# EAGLE board slugsMKIII (EAGLE 5.06)

Size 160 x 100 mm. Coordinates in mm from the lower left corner, seen from the top.
Outline: 0,0 160,0 160,100 0,100 0,0
Copper layers (1*16): Top 0.035mm / dielectric 1.5mm / Bottom 0.035mm
Design rules "default": minimum track width 10mil, minimum drill 24mil, track to track 8mil, track to pad 8mil, pad to pad 8mil, via to via 8mil, smd to smd 8mil, copper to edge 40mil, drill to drill 8mil, minimum pad ring 10mil, minimum via ring 8mil, stop-mask expansion 4mil, vias tented up to drill 0mil, thermal gap 10mil

## Footprints (pad centres in the part's own frame; a part is rotated, then mirrored left to right if it is on the bottom)
C0603 = smd 1.1 x 1: 1 -0.85,0; 2 0.85,0
C0805 = smd 1.3 x 1.5: 1 -0.95,0; 2 0.95,0
PANASONIC_G = smd 3.9 x 1.6: + 4.25,0; - -4.25,0
C1206 = smd 1.6 x 1.8: 1 -1.4,0; 2 1.4,0
SOD523 = smd 0.7 x 0.5: A 0.7,0; C -0.6,0
CHIP-LED0603 = smd 0.8 x 0.8: A 0,-0.75; C 0,0.75
DO35-10 = drill 0.813 pad 1.778 round: A 5.08,0; C -5.08,0
SOT23 = smd 1 x 1.4: 1 -0.95,-1.1; 2 0.95,-1.1; 3 0,1.1
CONECTOR_60_TYCO_MODIFICADO = drill 0.559 pad 0.65 long: 1 -18.415,11.099; 2 -17.145,11.099; 3 -15.875,11.099; 4 -14.605,11.099; 5 -13.335,11.099; 6 -12.065,11.099; 7 -10.795,11.099; 8 -9.525,11.099; 9 -8.255,11.099; 10 -6.985,11.099; 11 -5.715,11.099; 12 -4.445,11.099; 13 -3.175,11.099; 14 -1.905,11.099; 15 -0.635,11.099; 16 0.635,11.099; 17 1.905,11.099; 18 3.175,11.099; 19 4.445,11.099; 20 5.715,11.099; 21 6.985,11.099; 22 8.255,11.099; 23 9.525,11.099; 24 10.795,11.099; 25 12.065,11.099; 26 13.335,11.099; 27 14.605,11.099; 28 15.875,11.099; 29 17.145,11.099; 30 18.415,11.099; 31 18.415,8.599; 32 17.145,8.599; 33 15.875,8.599; 34 14.605,8.599; 35 13.335,8.599; 36 12.065,8.599; 37 10.795,8.599; 38 9.525,8.599; 39 8.225,8.599; 40 6.985,8.599; 41 5.715,8.599; 42 4.445,8.599; 43 3.175,8.599; 44 1.905,8.599; 45 0.635,8.599; 46 -0.635,8.599; 47 -1.905,8.599; 48 -3.175,8.599; 49 -4.445,8.599; 50 -5.715,8.599; 51 -6.985,8.599; 52 -8.255,8.599; 53 -9.525,8.599; 54 -10.795,8.599; 55 -12.065,8.599; 56 -13.335,8.599; 57 -14.605,8.599; 58 -15.875,8.599; 59 -17.145,8.599; 60 -18.415,8.599 | drill 0.94 pad 1.524 round: S1 -17.145,4.495; S2 0,4.495; S3 17.145,4.495
CON_BAT = drill 1 square: 1 -1.27,0; 2 1.27,0
R0603 = smd 1 x 1.1: 1 -0.85,0; 2 0.85,0
DSPIC33FJ256MC710PT = smd 1.5 x 0.2: 1 -6.7,4.8; 2 -6.7,4.4; 3 -6.7,4; 4 -6.7,3.6; 5 -6.7,3.2; 6 -6.7,2.8; 7 -6.7,2.4; 8 -6.7,2; 9 -6.7,1.6; 10 -6.7,1.2; 11 -6.7,0.8; 12 -6.7,0.4; 13 -6.7,0; 14 -6.7,-0.4; 15 -6.7,-0.8; 16 -6.7,-1.2; 17 -6.7,-1.6; 18 -6.7,-2; 19 -6.7,-2.4; 20 -6.7,-2.8; 21 -6.7,-3.2; 22 -6.7,-3.6; 23 -6.7,-4; 24 -6.7,-4.4; 25 -6.7,-4.8; 51 6.7,-4.8; 52 6.7,-4.4; 53 6.7,-4; 54 6.7,-3.6; 55 6.7,-3.2; 56 6.7,-2.8; 57 6.7,-2.4; 58 6.7,-2; 59 6.7,-1.6; 60 6.7,-1.2; 61 6.7,-0.8; 62 6.7,-0.4; 63 6.7,0; 64 6.7,0.4; 65 6.7,0.8; 66 6.7,1.2; 67 6.7,1.6; 68 6.7,2; 69 6.7,2.4; 70 6.7,2.8; 71 6.7,3.2; 72 6.7,3.6; 73 6.7,4; 74 6.7,4.4; 75 6.7,4.8 | smd 0.2 x 1.5: 26 -4.8,-6.7; 27 -4.4,-6.7; 28 -4,-6.7; 29 -3.6,-6.7; 30 -3.2,-6.7; 31 -2.8,-6.7; 32 -2.4,-6.7; 33 -2,-6.7; 34 -1.6,-6.7; 35 -1.2,-6.7; 36 -0.8,-6.7; 37 -0.4,-6.7; 38 0,-6.7; 39 0.4,-6.7; 40 0.8,-6.7; 41 1.2,-6.7; 42 1.6,-6.7; 43 2,-6.7; 44 2.4,-6.7; 45 2.8,-6.7; 46 3.2,-6.7; 47 3.6,-6.7; 48 4,-6.7; 49 4.4,-6.7; 50 4.8,-6.7; 76 4.8,6.7; 77 4.4,6.7; 78 4,6.7; 79 3.6,6.7; 80 3.2,6.7; 81 2.8,6.7; 82 2.4,6.7; 83 2,6.7; 84 1.6,6.7; 85 1.2,6.7; 86 0.8,6.7; 87 0.4,6.7; 88 0,6.7; 89 -0.4,6.7; 90 -0.8,6.7; 91 -1.2,6.7; 92 -1.6,6.7; 93 -2,6.7; 94 -2.4,6.7; 95 -2.8,6.7; 96 -3.2,6.7; 97 -3.6,6.7; 98 -4,6.7; 99 -4.4,6.7; 100 -4.8,6.7; P$63 -0.4,-6.7
CAN = smd 0.41 x 0.75: 1 -1.905,-3.075; 2 -0.635,-3.075; 3 0.635,-3.075; 4 1.905,-3.075; 5 1.905,3.075; 6 0.635,3.075; 7 -0.635,3.075; 8 -1.905,3.075
ECS2003 = smd 0.9 x 1.1: 1 -0.9,-0.7; 2 0.9,-0.7; 3 0.9,0.7; 4 -0.9,0.7
MCP9700_PATRON_RECOMENDADO = smd 0.5 x 0.95: 1 0.65,1.1; 2 -0.65,1.1; 3 0,-1.1
74CBTLV16210 = smd 0.273 x 0.765: 1 -7.302,-4.812; 2 -6.667,-4.812; 3 -6.032,-4.812; 4 -5.397,-4.812; 5 -4.762,-4.812; 6 -4.127,-4.812; 7 -3.492,-4.812; 8 -2.857,-4.812; 9 -2.222,-4.812; 10 -1.587,-4.812; 11 -0.953,-4.812; 12 -0.318,-4.812; 13 0.318,-4.812; 14 0.953,-4.812; 15 1.587,-4.812; 16 2.222,-4.812; 17 2.857,-4.812; 18 3.492,-4.812; 19 4.127,-4.812; 20 4.762,-4.812; 21 5.397,-4.812; 22 6.032,-4.812; 23 6.667,-4.812; 24 7.302,-4.812; 25 7.302,4.812; 26 6.667,4.812; 27 6.032,4.812; 28 5.397,4.812; 29 4.762,4.812; 30 4.127,4.812; 31 3.492,4.812; 32 2.857,4.812; 33 2.222,4.812; 34 1.587,4.812; 35 0.953,4.812; 36 0.318,4.812; 37 -0.318,4.812; 38 -0.953,4.812; 39 -1.587,4.812; 40 -2.222,4.812; 41 -2.857,4.812; 42 -3.492,4.812; 43 -4.127,4.812; 44 -4.762,4.812; 45 -5.397,4.812; 46 -6.032,4.812; 47 -6.667,4.812; 48 -7.302,4.812
MAX3223E = smd 0.3 x 0.55: 1 -1.3,-2.15; 2 -0.65,-2.15; 3 0,-2.15; 4 0.65,-2.15; 5 1.3,-2.15; 11 1.3,2.15; 12 0.65,2.15; 13 0,2.15; 14 -0.65,2.15; 15 -1.3,2.15 | smd 0.55 x 0.3: 6 2.15,-1.3; 7 2.15,-0.65; 8 2.15,0; 9 2.15,0.65; 10 2.15,1.3; 16 -2.15,1.3; 17 -2.15,0.65; 18 -2.15,0; 19 -2.15,-0.65; 20 -2.15,-1.3
PIC12F683 = smd 0.41 x 0.835: 1 -1.905,-2.57; 2 -0.635,-2.57; 3 0.635,-2.57; 4 1.905,-2.57; 5 1.905,2.57; 6 0.635,2.57; 7 -0.635,2.57; 8 -1.905,2.57
PTN78000WAH = drill 1.05 pad 1.778 round: 1 -7.94,4.76; 2 -7.94,-1.58; 3 -7.94,-4.76 | drill 1.05 pad 1.676 round: 4 7.94,-4.76; 5 7.94,4.76
LP38690SD-3.3 = smd 0.35 x 0.6: 1 0.95,1.4; 2 0,1.4; 3 -0.95,1.4; 4 -0.95,-1.4; 5 0,-1.4; 6 0.95,-1.4 | smd 2.1 x 1.6: GND 0,0
M08A = smd 0.6 x 2.2: 1 0,0; 2 1.27,0; 3 2.54,0; 4 3.81,0; 5 3.81,5.2; 6 2.54,5.2; 7 1.27,5.2; 8 0,5.2
ADIS16355AMLZ = smd 0.61 x 1.37: 1 5.5,-23.35; 2 5.5,-20.42; 3 4.5,-23.35; 4 4.5,-20.42; 5 3.5,-23.35; 6 3.5,-20.42; 7 2.5,-23.35; 8 2.5,-20.42; 9 1.5,-23.35; 10 1.5,-20.42; 11 0.5,-23.35; 12 0.5,-20.42; 13 -0.5,-23.35; 14 -0.5,-20.42; 15 -1.5,-23.35; 16 -1.5,-20.42; 17 -2.5,-23.35; 18 -2.5,-20.42; 19 -3.5,-23.35; 20 -3.5,-20.42; 21 -4.5,-23.35; 22 -4.5,-20.42; 23 -5.5,-23.35; 24 -5.5,-20.42
MTC14 = smd 0.42 x 1.78: 1 0,0; 2 0.65,0; 3 1.3,0; 4 1.95,0; 5 2.6,0; 6 3.25,0; 7 3.9,0; 8 3.9,5.94; 9 3.25,5.94; 10 2.6,5.94; 11 1.95,5.94; 12 1.3,5.94; 13 0.65,5.94; 14 0,5.94
1317A-03 = smd 1.35 x 0.69: 1 0,0; 2 0,-1.27; 3 0,-2.54; 4 0,-3.81; 5 9.83,-3.81; 6 9.83,-2.54; 7 9.83,-1.27; 8 9.83,0
1351-01 = smd 2.54 x 1.52: 1 0,0; 2 0,-2.54; 3 0,-5.08; 4 0,-7.62; 5 16.76,-7.62; 6 16.76,-5.08; 7 16.76,-2.54; 8 16.76,0
SOIC-8 = smd 1.7 x 0.65: 1 -3.759,1.905; 2 -3.759,0.635; 3 -3.759,-0.635; 4 -3.759,-1.905; 5 3.759,-1.905; 6 3.759,-0.635; 7 3.759,0.635; 8 3.759,1.905

## Placement (x,y rotation side)
C1  .1u  [C0603]  -67.31,107.95 0 top  (outside the outline)
C2  .1u  [C0603]  -72.39,107.95 0 top  (outside the outline)
C3  .1u  [C0603]  -77.47,107.95 0 top  (outside the outline)
C4  .1u  [C0603]  -82.55,107.95 0 top  (outside the outline)
C5  .1u  [C0603]  -87.63,107.95 0 top  (outside the outline)
C6  .1u  [C0603]  -92.71,107.95 0 top  (outside the outline)
C7  .1u  [C0603]  -97.79,107.95 0 top  (outside the outline)
C8  10u  [C0805]  -87.63,81.28 0 top  (outside the outline)
C9  .1u  [C0603]  -15.24,113.03 0 top  (outside the outline)
C10  .1u  [C0603]  -91.44,87.63 0 top  (outside the outline)
C11  .1u  [C0603]  -16.51,107.95 0 top  (outside the outline)
C12  .1u  [C0603]  -96.52,87.63 0 top  (outside the outline)
C13  .1u  [C0603]  -16.51,92.71 0 top  (outside the outline)
C14  .1u  [C0603]  -21.59,92.71 0 top  (outside the outline)
C15  .1u  [C0603]  -26.67,92.71 0 top  (outside the outline)
C16  10u  [C0805]  -41.91,81.28 0 top  (outside the outline)
C17  1u  [C0603]  -31.75,92.71 0 top  (outside the outline)
C18  1n  [C0603]  -36.83,92.71 0 top  (outside the outline)
C19  .1u  [C0603]  -41.91,92.71 0 top  (outside the outline)
C20  .1u  [C0603]  -46.99,92.71 0 top  (outside the outline)
C21  .1u  [C0603]  -52.07,92.71 0 top  (outside the outline)
C22  1u  [C0603]  -57.15,92.71 0 top  (outside the outline)
C23  1u  [C0603]  -62.23,92.71 0 top  (outside the outline)
C24  1u  [C0603]  -67.31,92.71 0 top  (outside the outline)
C25  1u  [C0603]  -72.39,92.71 0 top  (outside the outline)
C26  1u  [C0603]  -77.47,92.71 0 top  (outside the outline)
C27  .1u  [C0603]  -82.55,92.71 0 top  (outside the outline)
C28  .1u  [C0603]  -87.63,92.71 0 top  (outside the outline)
C29  .1u  [C0603]  -92.71,92.71 0 top  (outside the outline)
C30  .1u  [C0603]  -97.79,92.71 0 top  (outside the outline)
C31  .1u  [C0603]  -16.51,97.79 0 top  (outside the outline)
C32  .1u  [C0603]  -21.59,97.79 0 top  (outside the outline)
C33  .1u  [C0603]  -26.67,97.79 0 top  (outside the outline)
C34  220u  [PANASONIC_G]  -44.45,62.23 0 top  (outside the outline)
C35  10u,20V  [C1206]  -31.75,81.28 0 top  (outside the outline)
C36  10u  [C0805]  -46.99,81.28 0 top  (outside the outline)
C37  220u  [PANASONIC_G]  38.1,19.05 0 top
C38  .1u  [C0603]  -31.75,97.79 0 top  (outside the outline)
C39  10u  [C0805]  -52.07,81.28 0 top  (outside the outline)
C40  10u  [C0805]  -57.15,81.28 0 top  (outside the outline)
C41  .1u  [C0603]  -36.83,97.79 0 top  (outside the outline)
C42  .1u  [C0603]  -41.91,97.79 0 top  (outside the outline)
C43  22u  [C1206]  -36.83,81.28 0 top  (outside the outline)
C44  10u  [C0805]  -62.23,81.28 0 top  (outside the outline)
C45  .1u  [C0603]  -46.99,97.79 0 top  (outside the outline)
C46  .1u  [C0603]  -52.07,97.79 0 top  (outside the outline)
C47  10u  [C0805]  -67.31,81.28 0 top  (outside the outline)
C48  10u  [C0805]  -72.39,81.28 0 top  (outside the outline)
C49  .1u  [C0603]  -57.15,97.79 0 top  (outside the outline)
C50  10u  [C0805]  -77.47,81.28 0 top  (outside the outline)
C51  .1u  [C0603]  -62.23,97.79 0 top  (outside the outline)
C52  .1u  [C0603]  -67.31,97.79 0 top  (outside the outline)
C53  47p  [C0603]  -72.39,97.79 0 top  (outside the outline)
C54  .47u  [C0603]  -76.2,87.63 0 top  (outside the outline)
C55  .01u  [C0603]  -81.28,87.63 0 top  (outside the outline)
C56  1u  [C0603]  -77.47,97.79 0 top  (outside the outline)
C57  470p  [C0603]  -64.77,87.63 0 top  (outside the outline)
C58  2u2  [C0805]  -82.55,81.28 0 top  (outside the outline)
C59  .1u  [C0603]  -82.55,97.79 0 top  (outside the outline)
C60  .47u  [C0603]  -86.36,87.63 0 top  (outside the outline)
C61  .1u  [C0603]  -87.63,97.79 0 top  (outside the outline)
C62  .1u  [C0603]  -29.21,16.51 0 top  (outside the outline)
D1  1N4148WT  [SOD523]  -30.48,87.63 0 top  (outside the outline)
D2  1N4148WT  [SOD523]  -40.64,87.63 0 top  (outside the outline)
D3  LED0603  [CHIP-LED0603]  -91.44,58.42 0 top  (outside the outline)
D4  LED0603  [CHIP-LED0603]  -96.52,58.42 0 top  (outside the outline)
D5  LED0603  [CHIP-LED0603]  -15.24,69.85 0 top  (outside the outline)
D6  LED0603  [CHIP-LED0603]  -20.32,69.85 0 top  (outside the outline)
D7  LED0603  [CHIP-LED0603]  -25.4,69.85 0 top  (outside the outline)
D8  LED0603  [CHIP-LED0603]  -30.48,69.85 0 top  (outside the outline)
D9  LED0603  [CHIP-LED0603]  -35.56,69.85 0 top  (outside the outline)
D10  LED0603  [CHIP-LED0603]  -40.64,69.85 0 top  (outside the outline)
D11  LED0603  [CHIP-LED0603]  -45.72,69.85 0 top  (outside the outline)
D12  LED0603  [CHIP-LED0603]  -50.8,69.85 0 top  (outside the outline)
D13  1N4148  [DO35-10]  12.7,22.86 0 top
IC1  MC1525TT  [SOT23]  139.7,43.18 0 top
J1  CONNECTOR_60  [CONECTOR_60_TYCO_MODIFICADO]  119.38,16.51 0 top
J2  CON_BAT  [CON_BAT]  142.24,59.69 0 top
R1  4k7  [R0603]  -41.91,107.95 0 top  (outside the outline)
R2  4k7  [R0603]  -46.99,107.95 0 top  (outside the outline)
R3  200  [R0603]  -26.67,107.95 0 top  (outside the outline)
R4  120  [R0603]  -31.75,107.95 0 top  (outside the outline)
R5  120/OPT  [R0603]  -58.42,87.63 0 top  (outside the outline)
R6  47k  [R0603]  -52.07,107.95 0 top  (outside the outline)
R7  47k  [R0603]  -57.15,107.95 0 top  (outside the outline)
R8  100  [R0603]  -36.83,107.95 0 top  (outside the outline)
R9  12k  [R0603]  -62.23,107.95 0 top  (outside the outline)
R10  12k  [R0603]  -92.71,97.79 0 top  (outside the outline)
R11  5k  [R0603]  -21.59,107.95 0 top  (outside the outline)
R12  5k  [R0603]  -97.79,97.79 0 top  (outside the outline)
R13  5k  [R0603]  -16.51,102.87 0 top  (outside the outline)
R14  5k  [R0603]  -21.59,102.87 0 top  (outside the outline)
R15  5k  [R0603]  -26.67,102.87 0 top  (outside the outline)
R16  5k  [R0603]  -31.75,102.87 0 top  (outside the outline)
R17  5k  [R0603]  -36.83,102.87 0 top  (outside the outline)
R18  5k  [R0603]  -41.91,102.87 0 top  (outside the outline)
R19  5k  [R0603]  -46.99,102.87 0 top  (outside the outline)
R20  5k  [R0603]  -52.07,102.87 0 top  (outside the outline)
R21  13k1, 1%  [R0603]  -49.53,87.63 0 top  (outside the outline)
R22  330k  [R0603]  -71.12,87.63 0 top  (outside the outline)
R23  200  [R0603]  -57.15,102.87 0 top  (outside the outline)
R24  17k  [R0603]  -62.23,102.87 0 top  (outside the outline)
R25  3k3  [R0603]  -67.31,102.87 0 top  (outside the outline)
R26  34k  [R0603]  -72.39,102.87 0 top  (outside the outline)
R27  200  [R0603]  -77.47,102.87 0 top  (outside the outline)
R28  34k  [R0603]  -82.55,102.87 0 top  (outside the outline)
R29  200  [R0603]  -87.63,102.87 0 top  (outside the outline)
R30  10k  [R0603]  -92.71,102.87 0 top  (outside the outline)
R31  17k  [R0603]  -97.79,102.87 0 top  (outside the outline)
R32  18K2  [R0603]  -34.29,16.51 0 top  (outside the outline)
R33  1K  [R0603]  -34.29,11.43 0 top  (outside the outline)
R34  1K21  [R0603]  -34.29,6.35 0 top  (outside the outline)
U1  DSPIC33FJ256MC710PT  [DSPIC33FJ256MC710PT]  86.36,82.55 0 top
U2  DSPIC33FJ256MC710PT  [DSPIC33FJ256MC710PT]  -21.59,48.26 0 top  (outside the outline)
U3  [CAN]  116.84,44.45 0 top
U4  [ECS2003]  105.41,62.23 0 top
U5  [CAN]  53.34,43.18 0 top
U6  [MCP9700_PATRON_RECOMENDADO]  120.65,62.23 0 top
U7  [74CBTLV16210]  138.43,81.28 0 top
U8  [MAX3223E]  95.25,43.18 0 top
U9  [PIC12F683]  41.91,60.96 0 top
U10  [PTN78000WAH]  60.96,83.82 0 top
U11  [LP38690SD-3.3]  74.93,60.96 0 top
U12  [LP38690SD-3.3]  86.36,60.96 0 top
U13  [M08A]  30.48,40.64 0 top
U14  [ADIS16355AMLZ]  22.86,83.82 0 top
U15  [MTC14]  69.85,40.64 0 top
U16  MPXH6115A6U_6T1  [1317A-03]  7.62,45.72 0 top
U17  [1351-01]  67.31,24.13 0 top
U18  [SOIC-8]  57.15,60.96 0 top
U19  [MTC14]  109.22,78.74 0 top

## Library data of the parts
C1-C62 R1-R34 = rcl
D1 D2 = diode
D3-D12 = led
D13 = 1N4148DO35-10
IC1 = microchip; OC_FARNELL: unknown; OC_NEWARK: unknown
J1 = conector
J2 = Conector bateria
U1 U2 = DSPIC33FJ256MC710PT
U3 U5 = CAN
U4 = ECS2033
U6 = MCP9700 3 PINES patron recomendado
U7 = 74CBTLV16210_DL
U8 = MAX3223E
U9 = PIC 12F683
U10 = PTN78000WAH
U11 U12 = LP38690SD-3.3
U13 = LP2986AIMM
U14 = ADIS16355AMLZ
U15 U19 = LMV844MT
U16 = MPXH6115A6U_6T1
U17 = MPXV5004DP
U18 = SST25VF032B SOIC_8

## Nets
3V3D: C1.1 C2.1 C3.1 C4.1 C5.1 C6.1 C7.1 C9.1 C10.1 C11.1 C12.1 C13.1 C14.1 C15.1 C19.2 C20.1 C21.1 C22.2 C23.2 C24.2 C25.2 C26.2 C29.2 C40.1 C41.1 J1.16 J1.19 J1.23 J1.25 J1.29 R1.1 R2.1 R3.2 R6.1 R7.1 R11.2 U1.2 U1.16 U1.29 U1.30 U1.37 U1.46 U1.62 U1.86 U2.2 U2.16 U2.29 U2.30 U2.37 U2.46 U2.62 U2.86 U3.3 U4.4 U5.3 U8.12 U8.17 U8.18 U11.4 U11.5
3V3FS: C27.1 C28.2 C44.1 C45.1 C61.1 R9.2 R13.2 U7.15 U9.1 U12.4 U12.5 U18.8
5VA: C48.1 C49.1 C50.2 C51.2 C52.1 C55.1 C56.1 C59.2 R12.2 R22.1 U13.5 U13.6 U14.10 U14.11 U14.12 U15.4 U16.2 U17.2
5VESC: C42.1 C43.1 J1.7 U12.1 U12.6
6V: C36.1 C37.+ C38.1 C39.1 C46.1 C47.1 U10.5 U11.1 U11.6 U13.4 U13.8
+5V: C62.2 U19.4
APOFFRXON: R10.2 U2.83 U7.47 U9.6
APONRXOFF: R9.1 U2.97 U7.48 U9.7
BARO: C54.1 R24.1 R26.2 U15.10
BARO_BUFF: R29.2 U1.32
BATT: D13.A J2.1 R30.2
BATT_BUFF: R23.2 U1.34
CAN_CTRL_ON: U2.24 U3.8
CAN_SENS_ON: U1.89 U5.8
CANH: J1.39 R4.1 R5.1 U3.7 U5.7
CANL: J1.38 R4.2 R5.2 U3.6 U5.6
CANRX_CTRL: U2.87 U3.4
CANRX_SENS: U1.87 U5.4
CANTX_CTRL: U2.88 U3.1
CANTX_SENS: U1.88 U5.1
CTRL_BUSY: R16.2 U2.66
CTRL_CS: U2.14 U18.1
CTRL_DBG_MISO1: J1.20 U2.52
CTRL_DBG_MOSI1: J1.21 U2.51
CTRL_HOLD: U2.20 U18.7
CTRL_ICSP_PGC2: J1.33 U2.74
CTRL_ICSP_PGD2: J1.32 U2.73
CTRL_MCLR: D2.C J1.31 U2.13
CTRL_OVRLD: R17.2 U2.61
CTRL_SCK2: U2.10 U18.6
CTRL_SDI2: U2.11 U18.5
CTRL_SDO2: U2.12 U18.2
CTRL_SS2: J1.37 U2.18
CTRL_STATUS: R15.2 U2.67
CTRL_TEL_MISO2: J1.44 U2.49 U8.13
CTRL_TEL_MOSI2: J1.45 U2.50 U8.11
CTRL_WP: U2.21 U18.3
CUBE_DIO1: U1.8 U14.7
CUBE_DIO2: U1.9 U14.9
CUBE_RST*: U1.7 U14.8
CUBE_SCK: U1.10 U14.3
CUBE_SDI: U1.11 U14.4
CUBE_SDO: U1.12 U14.5
CUBE_SS: U1.14 U14.6
DEADMAN: J1.49 U2.1
FAILSAFE: J1.50 U1.48 U2.48 U9.5
GND: C1.2 C2.2 C3.2 C4.2 C5.2 C6.2 C7.2 C8.2 C9.2 C10.2 C11.2 C12.2 C13.2 C14.2 C15.2 C16.2 C17.2 C18.2 C19.1 C20.2 C21.2 C22.1 C23.1 C24.1 C25.1 C26.1 C27.2 C28.1 C29.1 C32.2 C33.2 C34.- C35.2 C36.2 C37.- C38.2 C39.2 C40.2 C41.2 C42.2 C43.2 C44.2 C45.2 C46.2 C47.2 C48.2 C49.2 C50.1 C51.1 C52.2 C53.2 C54.2 C55.2 C56.2 C57.2 C58.2 C59.1 C60.2 C61.2 C62.1 D3.C D4.C D5.C D6.C D7.C D8.C D9.C D10.C D11.C D12.C J1.6 J1.14 J1.15 J1.17 J1.18 J1.22 J1.24 J1.28 J2.2 R8.2 R10.1 R21.2 R25.2 R26.1 R28.2 R34.1 U1.15 U1.28 U1.31 U1.36 U1.45 U1.65 U1.75 U2.15 U2.28 U2.31 U2.36 U2.45 U2.65 U2.75 U3.2 U4.2 U5.2 U6.3 U7.8 U7.17 U7.32 U7.41 U8.16 U8.19 U9.8 U10.1 U11.2 U11.GND U12.2 U12.GND U13.1 U14.13 U14.14 U14.15 U15.11 U16.3 U17.3 U18.4 U19.11
GPS_MIGO: J1.47 U1.52
GPS_MOGI: J1.48 U1.51
INHIBIT: J1.46 U10.3
IPC_CISO: U1.53 U2.54
IPC_COSI: U1.54 U2.53
IPC_CSL: U1.23 U2.23
IPC_SCK: U1.55 U2.55
MAG_CLK: R1.2 U1.57
MAG_DAT: R2.2 U1.56
MASTER_CLK: U1.63 U2.63 U4.3
MUX_OVERIDE: U2.95 U9.2
N$1: R21.1 U10.4
N$2: D1.A R6.2
N$4: C53.1 R24.2 U16.4
N$5: R23.1 U15.1 U15.2
N$6: R33.1 U19.1
N$7: C58.1 R25.1 R30.1 U15.3
N$8: R32.1 R33.2 R34.2
N$10: R27.1 U15.6 U15.7
N$11: C34.+ C35.1 D13.C U10.2
N$12: U13.2 U13.3
N$14: R29.1 U15.8 U15.9
N$15: R31.1 U15.13 U15.14
N$16: R22.2 U13.7
N$32: C30.2 U8.1
N$34: D3.A R11.1
N$67: C8.1 U1.85
N$70: D4.A R12.1
N$104: D5.A R13.1
N$106: D6.A R14.1
N$107: D7.A R15.1
N$108: D8.A R16.1
N$109: D9.A R17.1
N$111: D10.A R18.1
N$112: D11.A R19.1
N$113: D12.A R20.1
N$114: C30.1 U8.2
N$115: C32.1 U8.20
N$116: C31.2 U8.3
N$117: C31.1 U8.4
N$118: C33.1 U8.5
N$135: D2.A R7.2
N$146: C16.1 U2.85
N$161: R8.1 U9.4
N$170: C17.1 R3.1 U6.1
PICSTATUS: R14.2 U9.3
PITOT: C57.1 U15.12 U17.4
PITOT_BUFF: R27.2 U1.33
PITOT_DIVIDE: C60.1 R28.1 R31.2 U15.5
RC_IN_0_RUD: J1.12 U1.79 U2.79 U7.24
RC_IN_1_LELEV: J1.51 U1.71 U2.71 U7.23
RC_IN_2_LAILE: J1.11 U1.70 U2.70 U7.22
RC_IN_3_THRO: J1.52 U1.69 U2.69 U7.21
RC_IN_4_RAILE: J1.10 U1.80 U2.80 U7.20
RC_IN_5_AUX2: J1.53 U7.19
RC_IN_6_AUX1: J1.9 U7.18
RC_IN_7_RFLA: J1.54 U7.16
RC_IN_8_RELEV: J1.8 U7.14
RC_IN_9_LFLA: J1.55 U1.47 U2.47 U7.13
RC_MCU_0_RUD: U2.93 U7.2
RC_MCU_1_LELEV: U2.98 U7.3
RC_MCU_2_LAILE: U2.100 U7.4
RC_MCU_3_THRO: U2.4 U7.5
RC_MCU_4_RAILE: U2.72 U7.6
RC_MCU_5_AUX2: U2.76 U7.7
RC_MCU_6_AUX1: U2.77 U7.9
RC_MCU_7_RFLA: U2.78 U7.10
RC_MCU_8_RELEV: U2.81 U7.11
RC_MCU_9_LFLA: U2.82 U7.12
RC_OUT_0_RUD: J1.5 U7.25 U7.46
RC_OUT_1_LELEV: J1.56 U7.26 U7.45
RC_OUT_2_LAILE: J1.4 U7.27 U7.44
RC_OUT_3_THRO: J1.57 U7.28 U7.43
RC_OUT_4_RAILE: J1.3 U7.29 U7.42
RC_OUT_5_AUX2: J1.58 U7.30 U7.40
RC_OUT_6_AUX1: J1.2 U7.31 U7.39
RC_OUT_7_RFLA: J1.59 U7.33 U7.38
RC_OUT_8_RELEV: J1.1 U7.34 U7.37
RC_OUT_9_LFLA: J1.60 U7.35 U7.36
RS232_CTRL_TEL_MISO2: J1.41 U8.14
RS232_CTRL_TEL_MOSI2: J1.40 U8.15
RS232_SENS_MISO2: J1.43 U8.7
RS232_SENS_MOSI2: J1.42 U8.6
SENS_BUSY: R19.2 U1.24
SENS_ICSP_PGC2: J1.26 U1.74
SENS_ICSP_PGD2: J1.27 U1.73
SENS_MCLR: D1.C J1.30 U1.13
SENS_MISO2: U1.49 U8.8
SENS_MOSI2: U1.50 U8.10
SENS_OVRLD: R20.2 U1.26
SENS_STATUS: R18.2 U1.25
SYNC1: U1.66 U2.26
SYNC2: U1.77 U2.19
TACH: J1.13 U1.68 U2.68
THERM: C18.1 U1.35 U6.2

## Tracks (layer width: path | path; a pad name or v marks a point on that pad's centre or on a via)
3V3D  (59 unrouted)
3V3FS  (11 unrouted)
5VA  (17 unrouted)
5VESC  (4 unrouted)
6V  (10 unrouted)
+5V  (1 unrouted)
APOFFRXON  (3 unrouted)
APONRXOFF  (3 unrouted)
BARO  (3 unrouted)
BARO_BUFF  (1 unrouted)
BATT  (2 unrouted)
BATT_BUFF  (1 unrouted)
CAN_CTRL_ON  (1 unrouted)
CAN_SENS_ON  (1 unrouted)
CANH  (4 unrouted)
CANL  (4 unrouted)
CANRX_CTRL  (1 unrouted)
CANRX_SENS  (1 unrouted)
CANTX_CTRL  (1 unrouted)
CANTX_SENS  (1 unrouted)
CTRL_BUSY  (1 unrouted)
CTRL_CS  (1 unrouted)
CTRL_DBG_MISO1  (1 unrouted)
CTRL_DBG_MOSI1  (1 unrouted)
CTRL_HOLD  (1 unrouted)
CTRL_ICSP_PGC2  (1 unrouted)
CTRL_ICSP_PGD2  (1 unrouted)
CTRL_MCLR  (2 unrouted)
CTRL_OVRLD  (1 unrouted)
CTRL_SCK2  (1 unrouted)
CTRL_SDI2  (1 unrouted)
CTRL_SDO2  (1 unrouted)
CTRL_SS2  (1 unrouted)
CTRL_STATUS  (1 unrouted)
CTRL_TEL_MISO2  (2 unrouted)
CTRL_TEL_MOSI2  (2 unrouted)
CTRL_WP  (1 unrouted)
CUBE_DIO1  (1 unrouted)
CUBE_DIO2  (1 unrouted)
CUBE_RST*  (1 unrouted)
CUBE_SCK  (1 unrouted)
CUBE_SDI  (1 unrouted)
CUBE_SDO  (1 unrouted)
CUBE_SS  (1 unrouted)
DEADMAN  (1 unrouted)
FAILSAFE  (3 unrouted)
GND  (124 unrouted)
GPS_MIGO  (1 unrouted)
GPS_MOGI  (1 unrouted)
INHIBIT  (1 unrouted)
IPC_CISO  (1 unrouted)
IPC_COSI  (1 unrouted)
IPC_CSL  (1 unrouted)
IPC_SCK  (1 unrouted)
MAG_CLK  (1 unrouted)
MAG_DAT  (1 unrouted)
MASTER_CLK  (2 unrouted)
MUX_OVERIDE  (1 unrouted)
N$1  (1 unrouted)
N$2  (1 unrouted)
N$4  (2 unrouted)
N$5  (2 unrouted)
N$6  (1 unrouted)
N$7  (3 unrouted)
N$8  (2 unrouted)
N$10  (2 unrouted)
N$11  (3 unrouted)
N$12  (1 unrouted)
N$14  (2 unrouted)
N$15  (2 unrouted)
N$16  (1 unrouted)
N$32  (1 unrouted)
N$34  (1 unrouted)
N$67  (1 unrouted)
N$70  (1 unrouted)
N$104  (1 unrouted)
N$106  (1 unrouted)
N$107  (1 unrouted)
N$108  (1 unrouted)
N$109  (1 unrouted)
N$111  (1 unrouted)
N$112  (1 unrouted)
N$113  (1 unrouted)
N$114  (1 unrouted)
N$115  (1 unrouted)
N$116  (1 unrouted)
N$117  (1 unrouted)
N$118  (1 unrouted)
N$135  (1 unrouted)
N$146  (1 unrouted)
N$161  (1 unrouted)
N$170  (2 unrouted)
PICSTATUS  (1 unrouted)
PITOT  (2 unrouted)
PITOT_BUFF  (1 unrouted)
PITOT_DIVIDE  (3 unrouted)
RC_IN_0_RUD  (3 unrouted)
RC_IN_1_LELEV  (3 unrouted)
RC_IN_2_LAILE  (3 unrouted)
RC_IN_3_THRO  (3 unrouted)
RC_IN_4_RAILE  (3 unrouted)
RC_IN_5_AUX2  (1 unrouted)
RC_IN_6_AUX1  (1 unrouted)
RC_IN_7_RFLA  (1 unrouted)
RC_IN_8_RELEV  (1 unrouted)
RC_IN_9_LFLA  (3 unrouted)
RC_MCU_0_RUD  (1 unrouted)
RC_MCU_1_LELEV  (1 unrouted)
RC_MCU_2_LAILE  (1 unrouted)
RC_MCU_3_THRO  (1 unrouted)
RC_MCU_4_RAILE  (1 unrouted)
RC_MCU_5_AUX2  (1 unrouted)
RC_MCU_6_AUX1  (1 unrouted)
RC_MCU_7_RFLA  (1 unrouted)
RC_MCU_8_RELEV  (1 unrouted)
RC_MCU_9_LFLA  (1 unrouted)
RC_OUT_0_RUD  (2 unrouted)
RC_OUT_1_LELEV  (2 unrouted)
RC_OUT_2_LAILE  (2 unrouted)
RC_OUT_3_THRO  (2 unrouted)
RC_OUT_4_RAILE  (2 unrouted)
RC_OUT_5_AUX2  (2 unrouted)
RC_OUT_6_AUX1  (2 unrouted)
RC_OUT_7_RFLA  (2 unrouted)
RC_OUT_8_RELEV  (2 unrouted)
RC_OUT_9_LFLA  (2 unrouted)
RS232_CTRL_TEL_MISO2  (1 unrouted)
RS232_CTRL_TEL_MOSI2  (1 unrouted)
RS232_SENS_MISO2  (1 unrouted)
RS232_SENS_MOSI2  (1 unrouted)
SENS_BUSY  (1 unrouted)
SENS_ICSP_PGC2  (1 unrouted)
SENS_ICSP_PGD2  (1 unrouted)
SENS_MCLR  (2 unrouted)
SENS_MISO2  (1 unrouted)
SENS_MOSI2  (1 unrouted)
SENS_OVRLD  (1 unrouted)
SENS_STATUS  (1 unrouted)
SYNC1  (1 unrouted)
SYNC2  (1 unrouted)
TACH  (2 unrouted)
THERM  (2 unrouted)